# Altium PCB Main.PcbDoc
Units mil, origin at the board's own origin, x right, y up, seen from the top; angles counter-clockwise.
Board outline 2559.06 x 2204.72 mil, 4 copper layers (GND1, Pwr/Sig 2, Pwr/Sig 3, GND4), stack 62.449 mil thick; 21 components, 51 nets, 139 pads, 0 vias.
Unrouted connection lines stored in the file: 52.
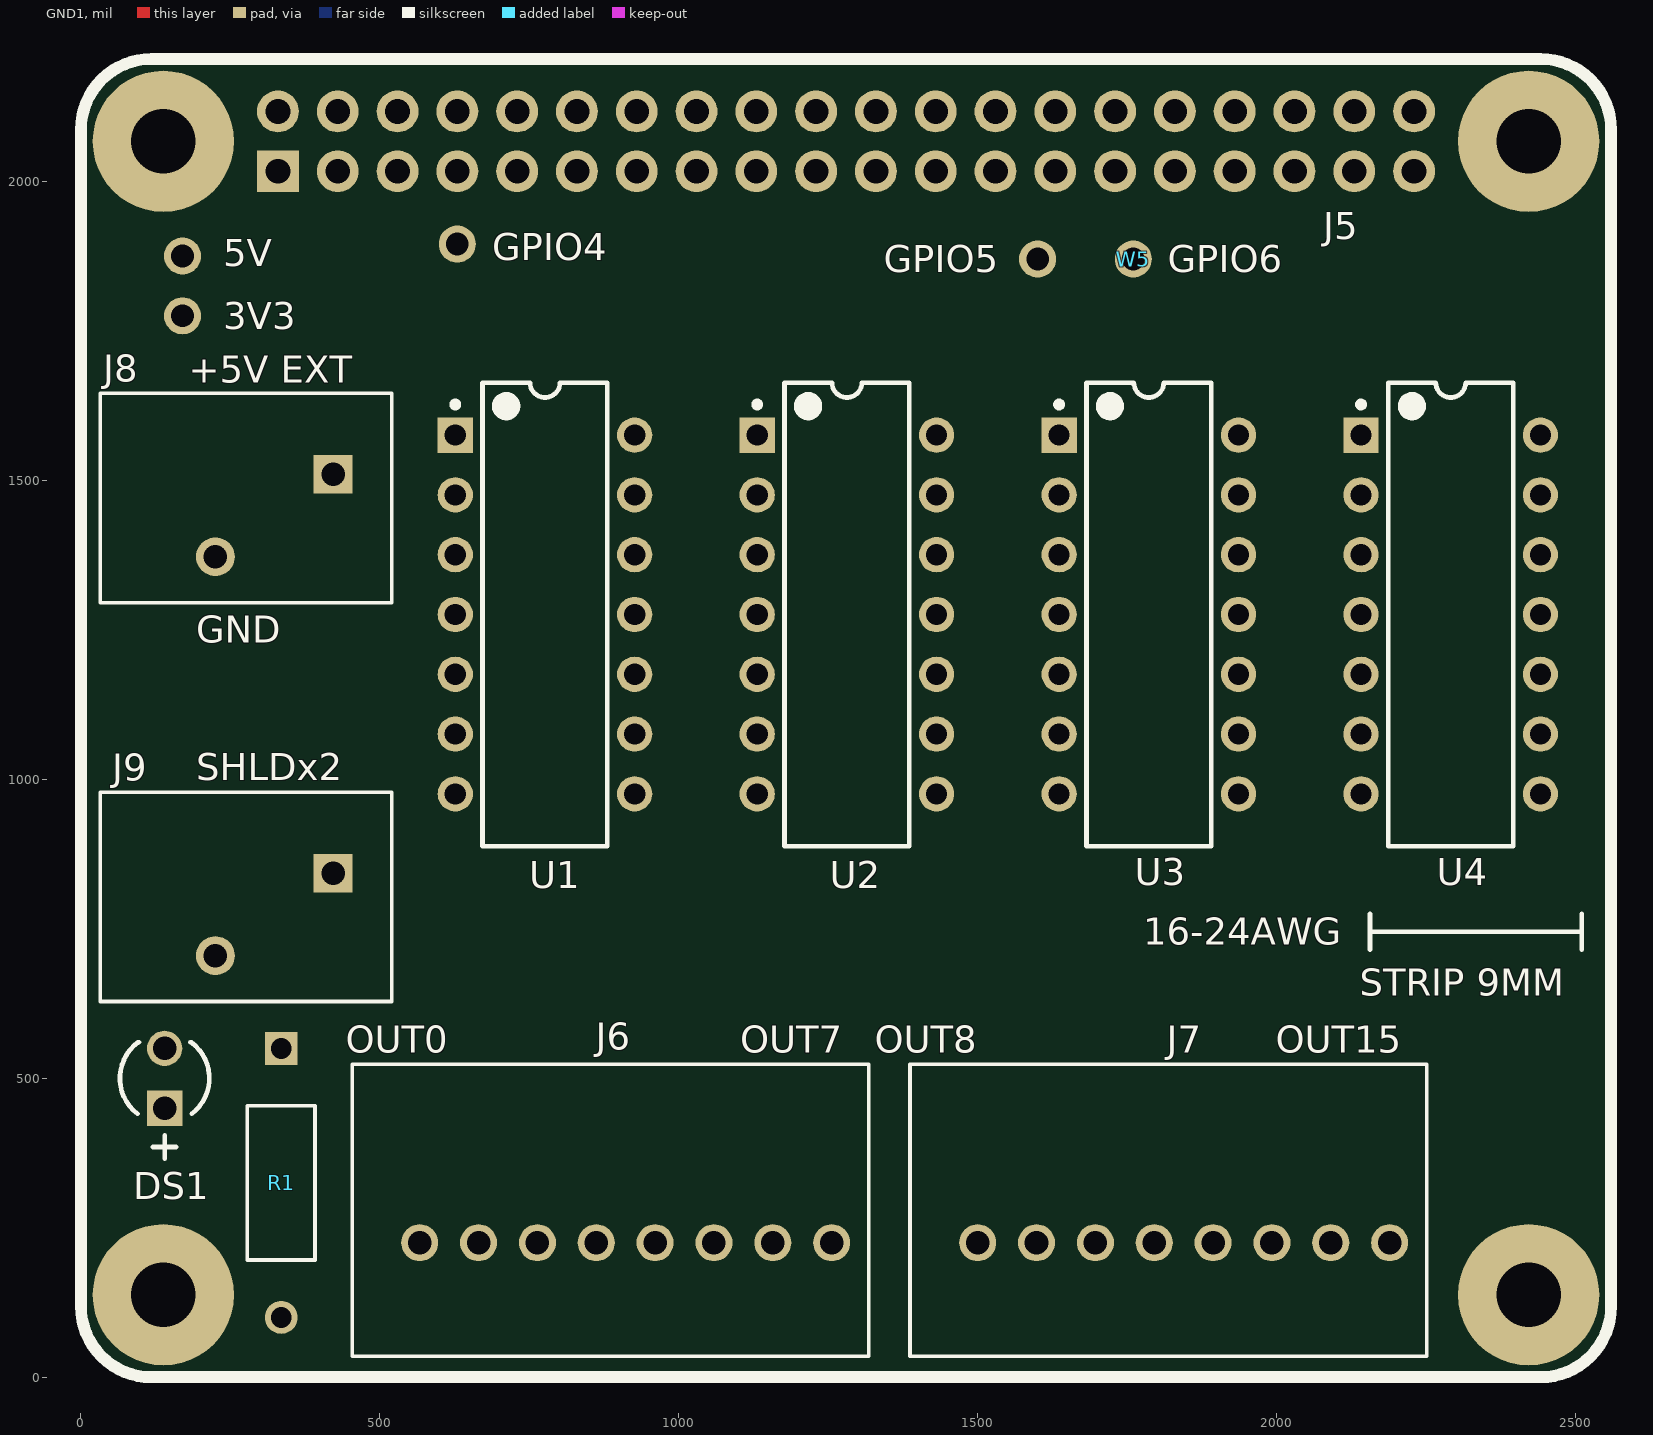
[diagram p0: GND1 view]
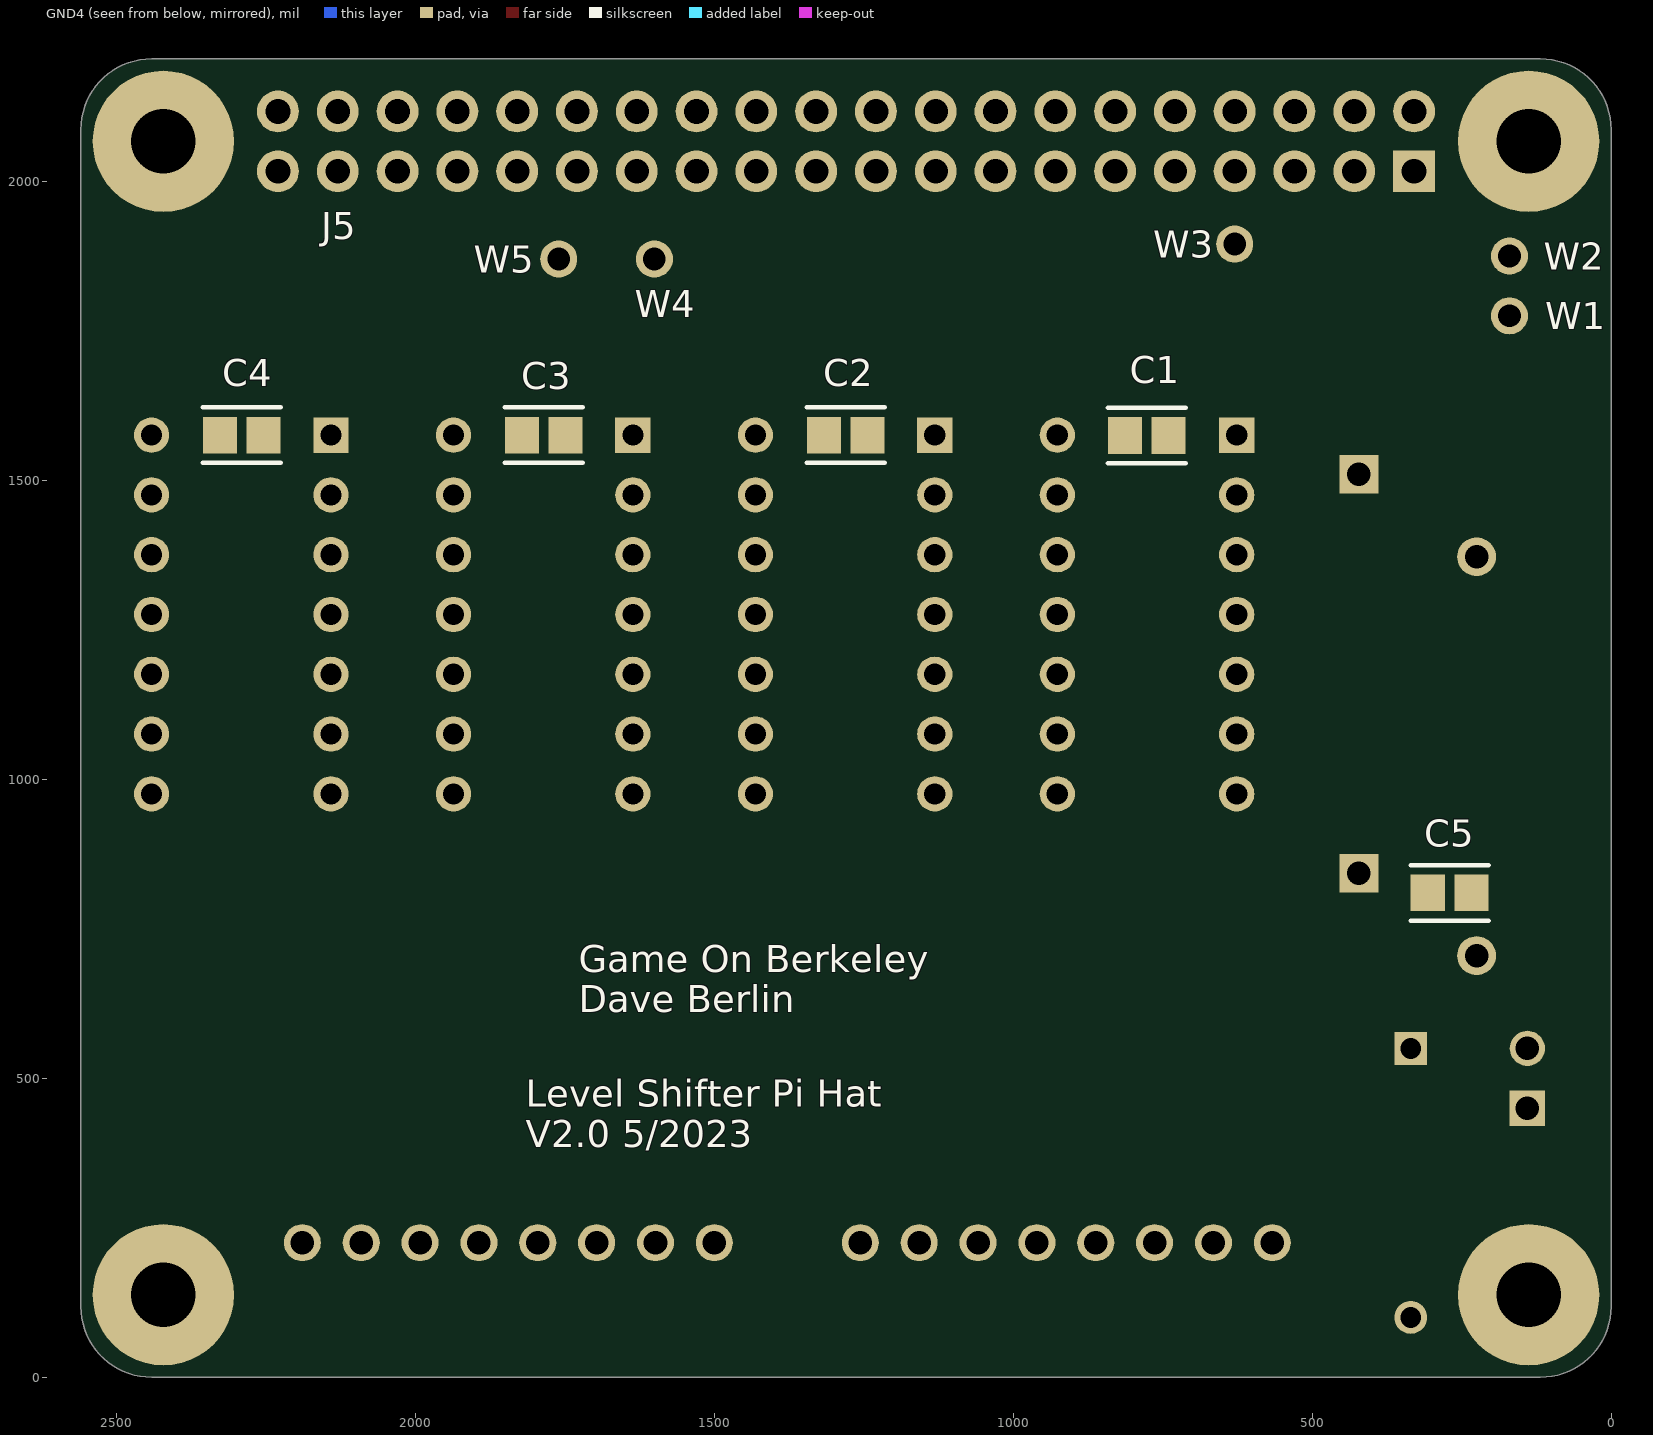
[diagram p1: GND4 view, seen from below]
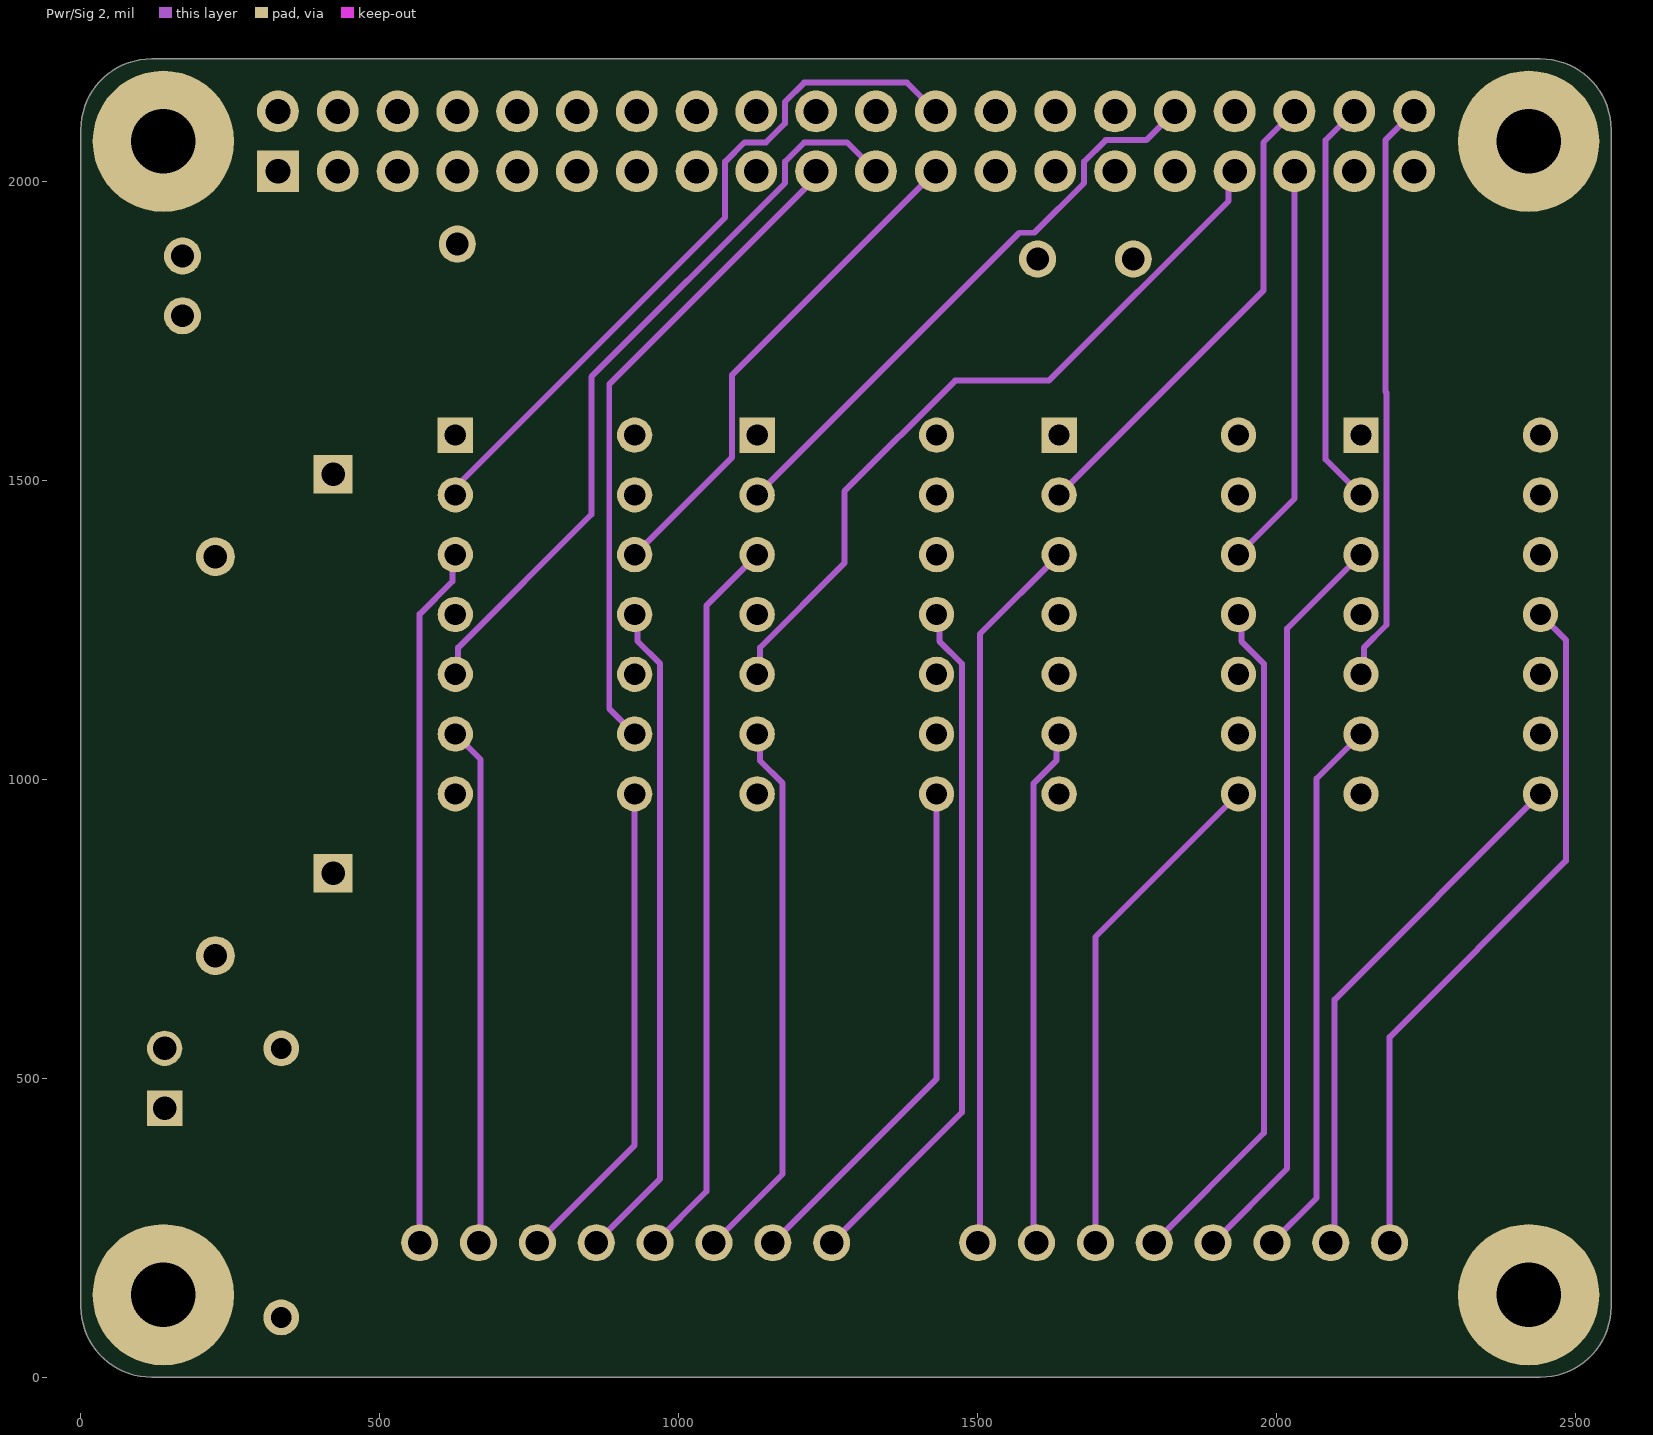
[diagram p2: Pwr/Sig 2]
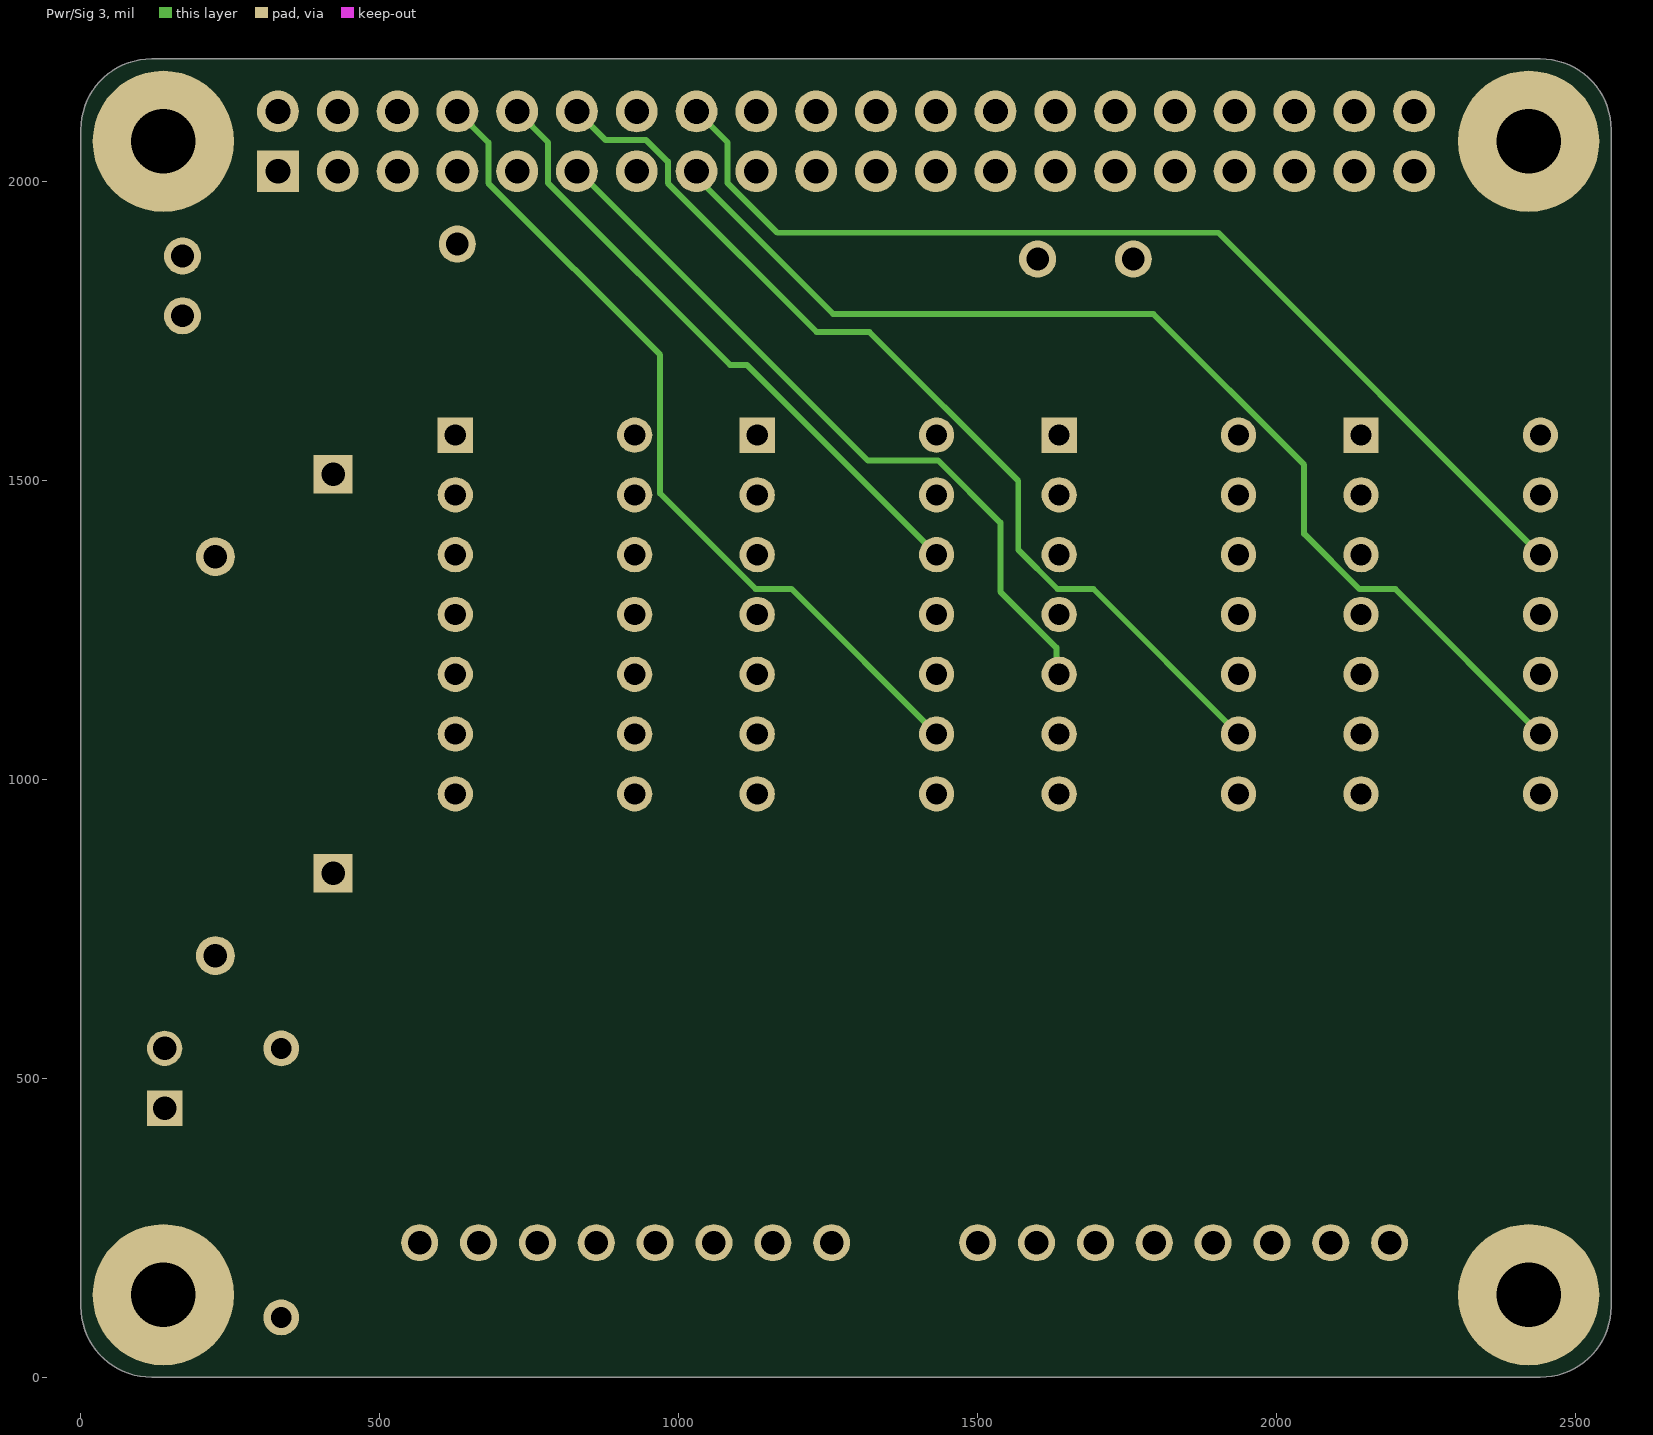
[diagram p3: Pwr/Sig 3]
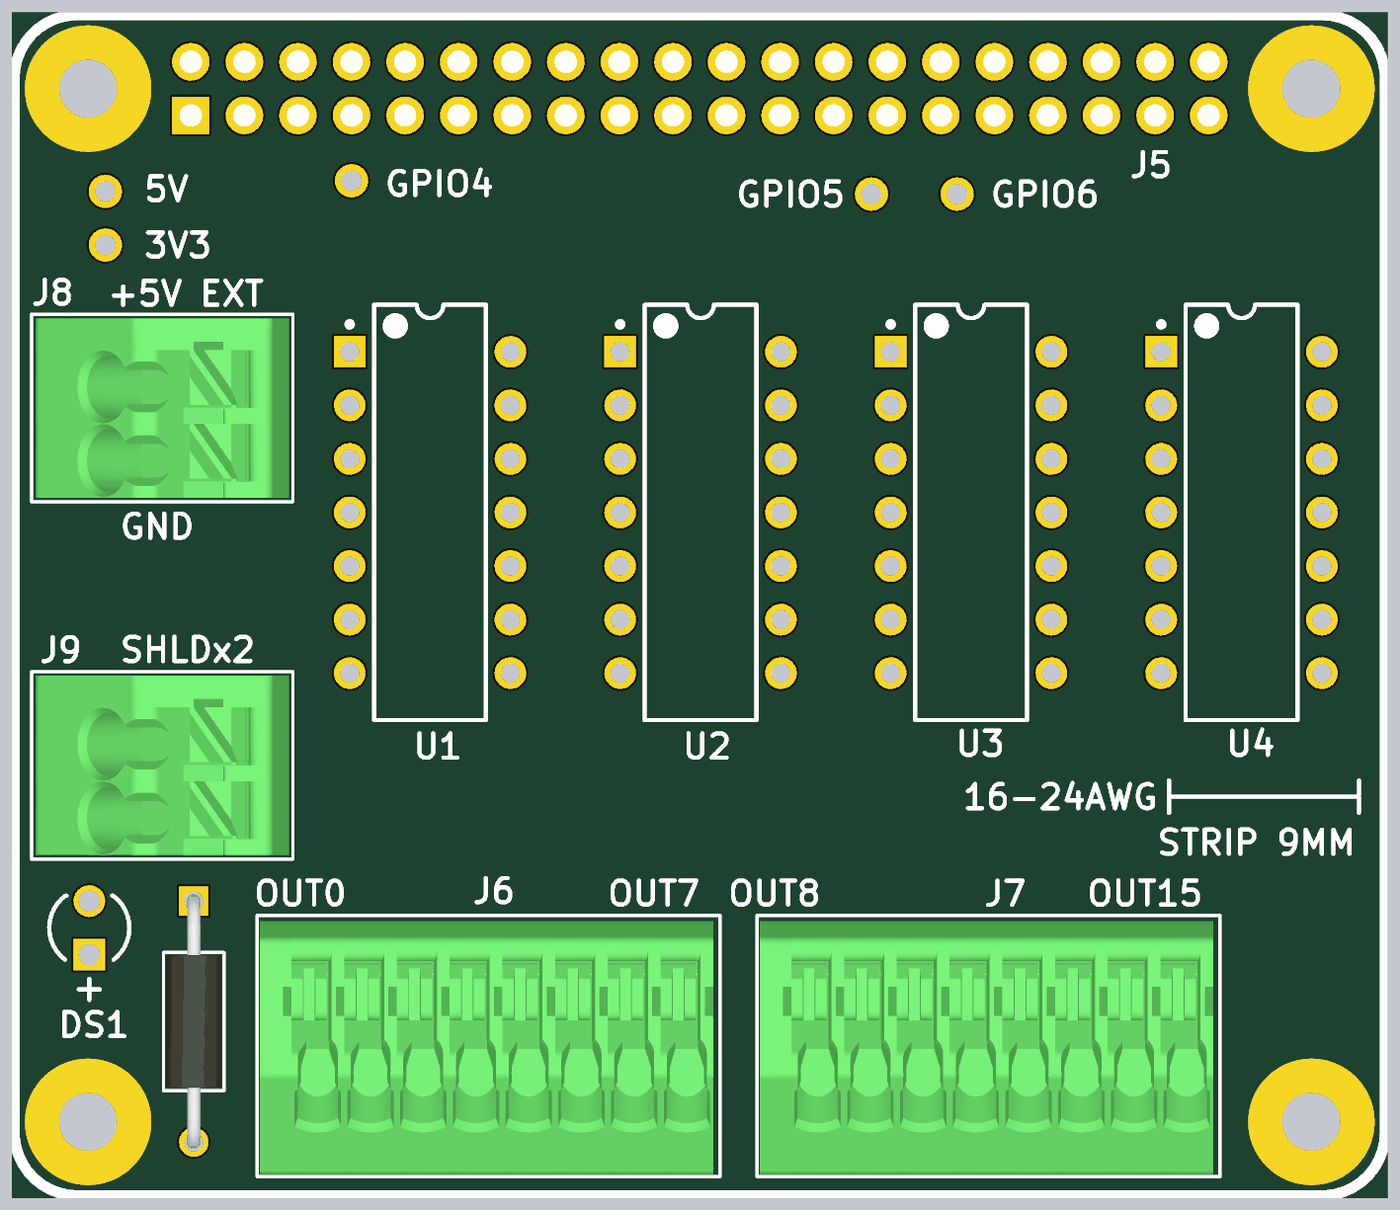
[diagram p4: 3D render of the assembled board from above, using the file's embedded part models]
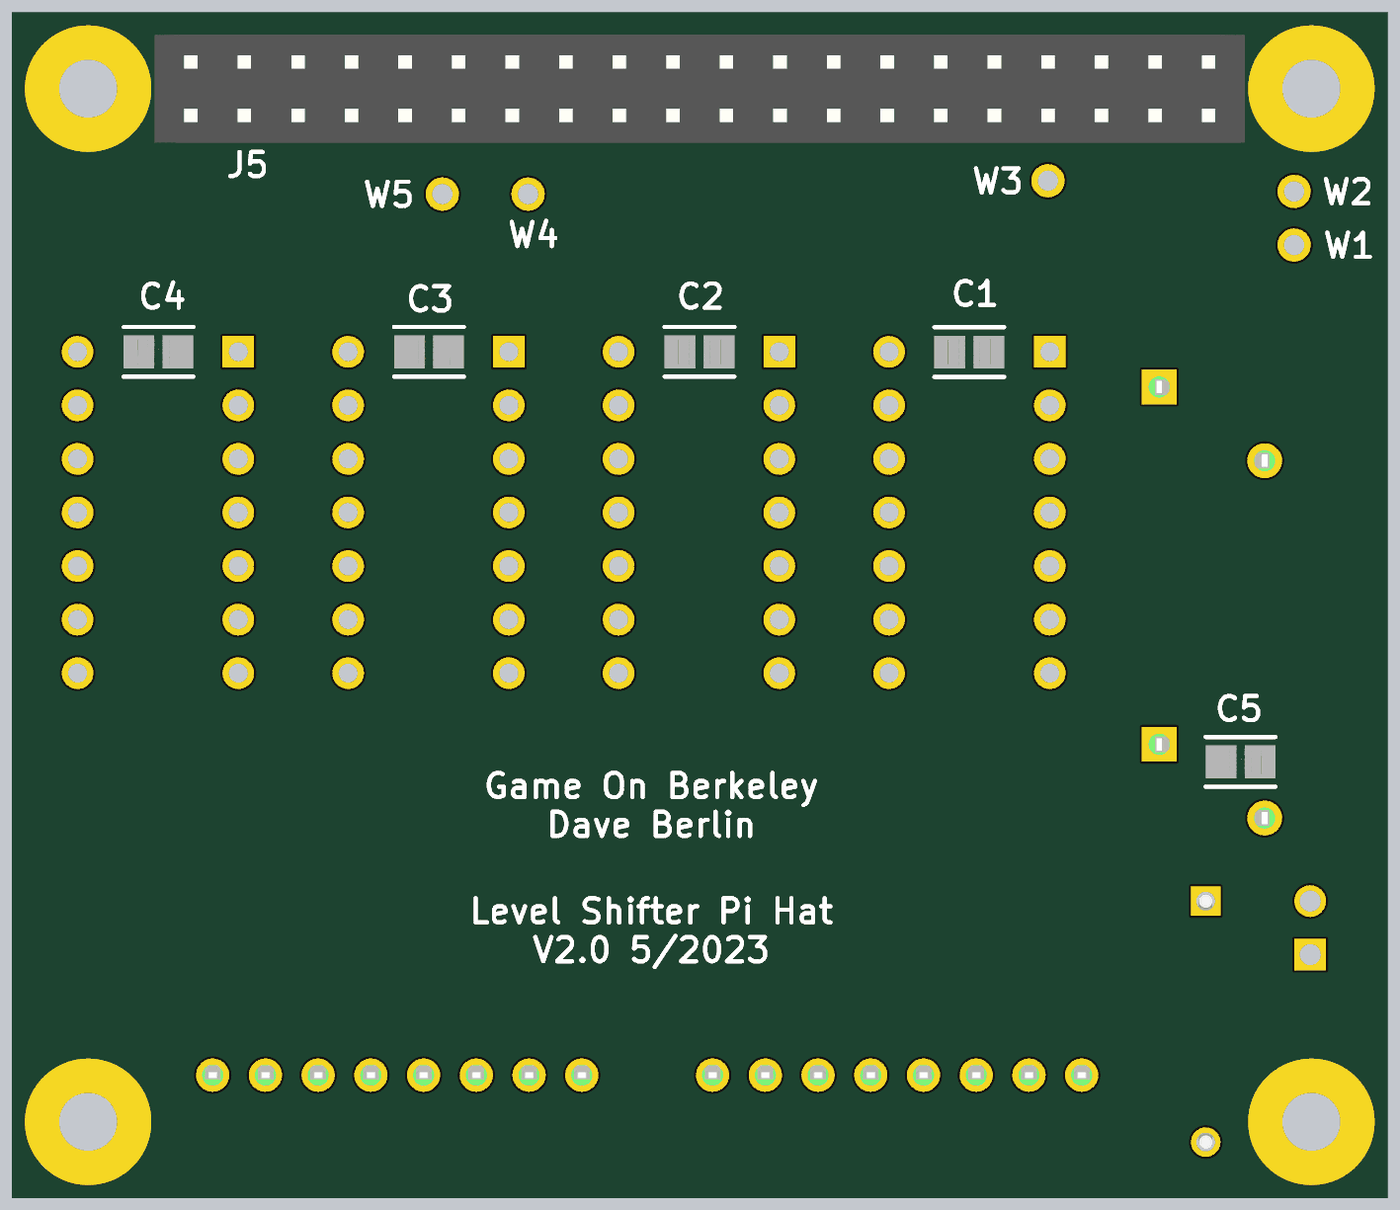
[diagram p5: 3D render of the assembled board from below, using the file's embedded part models]

## Layer stack, top to bottom
Top Solder: solder mask 0.8, Solder Resist, Dk 3.8
GND1: signal copper 1.378
Dielectric 2: prepreg 8.284, PP-022, Dk 4.6
Pwr/Sig 2: signal copper 0.5984
Dielectric 1: dielectric 41.929, FR-4, Dk 4.6
Pwr/Sig 3: signal copper 0.5984
Dielectric 3: prepreg 8.2835, PP-022, Dk 4.6
GND4: signal copper 1.378
Bottom Solder: solder mask 0.8, Solder Resist, Dk 3.8

## Board outline
0,118.11 0,2086.61 cw(c118.11,2086.61) 118.11,2204.72 2440.94,2204.72 cw(c2440.94,2086.61) 2559.06,2086.61 2559.06,118.11 cw(c2440.94,118.11) 2440.94,0 118.11,0 cw(c118.11,118.11)

## Design rules (kind name [scope] priority, off if disabled: settings)
BoardOutlineClearance BoardOutlineClearance_Silk [OnLayer('Top Overlay')] p1: gap=0 ignorepadtopadclearanceinfootprint=FALSE
BoardOutlineClearance [All] p2: gap=7.87 ignorepadtopadclearanceinfootprint=FALSE
Clearance Clearance_HighSpeed1 [InNetClass('HighSpeed')] p1: gap=8 ignorepadtopadclearanceinfootprint=TRUE except(10: Arc-Via Track-Via; 12.99: Arc-Hole Track-Hole; 19.68: THPad-THPad; 20: Arc-Arc Arc-Track Track-Track)
Clearance [All] p2: gap=10 ignorepadtopadclearanceinfootprint=FALSE except(12.99: Arc-Hole Track-Hole; 19.68: THPad-THPad)
Clearance Clearance_Same_Net [All] p3: gap=0 ignorepadtopadclearanceinfootprint=FALSE except(10: Via-Via)
HoleSize HoleSize_Fiducial [HasFootprint('FID1X2R')] p1: absolutevalues=TRUE maxlimit=393.7 minlimit=0 maxpercent=80.000 minpercent=20.000
HoleSize HoleSize_Via [IsVia] p2: absolutevalues=TRUE maxlimit=248.03 minlimit=11.81 maxpercent=80.000 minpercent=20.000
HoleSize [All] p3: absolutevalues=TRUE maxlimit=248.03 minlimit=9.84 maxpercent=80.000 minpercent=20.000
HoleToHoleClearance [All] p1: gap=19.68 allowstackedmicrovias=TRUE
MinimumAnnularRing MinimumAnnularRing_Via [IsVia] p1: minimumring=7.87
MinimumAnnularRing [All] p2: minimumring=9.84
PolygonConnect ViaConnect [All vs IsVia] p1: connectstyle=Direct reliefconductorwidth=10 reliefentries=4 polygonreliefangle="90 Angle" airgapwidth=10
PolygonConnect DFLYConnect [HasFootprint('CR_SK56AFL_MCE')] p2: connectstyle=Relief reliefconductorwidth=20 reliefentries=4 polygonreliefangle="90 Angle" airgapwidth=10
PolygonConnect COUTConnect [HasFootprint('CAP_YX_16X20_RUB')] p3: connectstyle=Relief reliefconductorwidth=20 reliefentries=4 polygonreliefangle="90 Angle" airgapwidth=15
PolygonConnect TransformerConnect [HasFootprint('EE20%2F9%2F11_THT_H_14PIN_EXT_(5443)')] p4: connectstyle=Relief reliefconductorwidth=15 reliefentries=4 polygonreliefangle="90 Angle" airgapwidth=10 // 5 spokes connect per net
PolygonConnect [All] p5: connectstyle=Relief reliefconductorwidth=10 reliefentries=4 polygonreliefangle="90 Angle" airgapwidth=10
ReturnPath [InNetClass('HighSpeed')] p1: _gaplimit=0
RoutingVias [All] p1: holewidth=14.96 width=25 viastyle="Through Hole" minholewidth=11.81 minwidth=19.68 maxholewidth=100 maxwidth=200
SilkToSolderMaskClearance [IsPad] p1: minsilkscreentomaskgap=9 clearancetoexposedcopper=TRUE
SolderMaskExpansion [All] p1: expansion=4 istentingtop=FALSE
UnRoutedNet [All] p1: checkbadconnections=TRUE
Width Width_5V [InNet('5V_EXT')] p1: maxlimit=40 minlimit=40 preferedwidth=40
Width Width_HighSpeed [InNetClass('HighSpeed')] p2: maxlimit=10 minlimit=10 preferedwidth=10
Width [All] p3: maxlimit=100 minlimit=12 preferedwidth=12
26 further rules are at their usual default settings.

## Classes and differential pairs
net class HighSpeed: OUT0 OUT1 OUT2 OUT3 OUT4 OUT5 OUT6 OUT7 OUT8 OUT9 OUT10 OUT11 OUT12 OUT13 OUT14 OUT15 SD0 SD1 SD2 SD3 SD4 SD5 SD6 SD7 SD8 SD9 SD10 SD11 SD12 SD13 SD14 SD15

## Components (designator, comment, footprint, x,y, rotation, side; value= is the part's Value field where it differs from the comment)
C1 "CL21B104KBCNNNC" FP-CL21-IPC_A 776.45,1575 r180 bottom value=100nF
C2 "CL21B104KBCNNNC" FP-CL21-IPC_A 1280,1575.58 r180 bottom value=100nF
C3 "CL21B104KBCNNNC" FP-CL21-IPC_A 1785,1575.58 r180 bottom value=100nF
C4 "CL21B104KBCNNNC" FP-CL21-IPC_A 2290,1575.58 r180 bottom value=100nF
C5 "CL21A475KAQNNNE" FP-CL21-IPC_A 270,810 r180 bottom value=4.7uF
DS1 "BL-BGE1V5D-AT" LED-2P-2.54-3MM 140,500 r90 top
J5 "PRT-16763" PRT-16763-Footprint-1 329.53,2116.93 r0 bottom locked
J6 "1989803" CONN_1989803_PXC 566.57,225 r0 top
J7 "1989803" CONN_1989803_PXC 1499.73,225 r0 top
J8 "1985195" CONN_1985195_PXC 225,1372.2 r270 top
J9 "1985195" CONN_1985195_PXC 225,705 r270 top
R1 "CF14JT150R" STA_CF14_STP 335,550 r270 top value=150R
U1 "SN74AHCT125N" N0014A 776.1,1275.58 r0 top
U2 "SN74AHCT125N" N0014A 1281.02,1275.58 r0 top
U3 "SN74AHCT125N" N0014A 1785.94,1275.58 r0 top
U4 "SN74AHCT125N" N0014A 2290.87,1275.58 r0 top
W1 "WIRE-PAD-20AWG" WIRE-PAD-20AWG 170,1775 r180 bottom
W2 "WIRE-PAD-20AWG" WIRE-PAD-20AWG 170,1875 r180 bottom
W3 "WIRE-PAD-20AWG" WIRE-PAD-20AWG 629.53,1895 r180 bottom
W4 "WIRE-PAD-20AWG" WIRE-PAD-20AWG 1600,1870 r180 bottom
W5 "WIRE-PAD-20AWG" WIRE-PAD-20AWG 1760,1870 r0 top

## Footprints (in the part's own frame and the unit in brackets; to place one, negate y for a bottom-side part, rotate by r counter-clockwise, add the part's x,y. Pads: shape width x height; smd on the part's side, far side on the other; paste and mask are expansions set on the pad)
CONN_1985195_PXC [mm]
  rect 1.65x1.65 hole 1: 1(-3.5,5)
  round 1.65 hole 1: 2(0,0)
  silkscreen extent -6.95,-4.9 1.95,7.5, body extent -6.75,-4.7 1.75,7.3, height 13.1
CONN_1989803_PXC [mil]
  round 62 hole 39.37: 1(0,0) 2(98.43,0) 3(196.85,0) 4(295.28,0) 5(393.7,0) 6(492.13,0) 7(590.55,0) 8(688.98,0)
  silkscreen extent -113,-190 751,298, body extent -108,-185 738,287, height 516
FP-CL21-IPC_A [mil]
  rect 57.27x61.27 smd paste+0 mask+0: 1(-36.45,0) 2(36.45,0)
  silkscreen extent -65,-46 65,46, body extent -39,-25 39,25, height 57
LED-2P-2.54-3MM [mm] "LED, 2-Leads, Dia 3mm, Pitch 2.54mm"
  rect 1.5x1.5 hole 1: 1(-1.27,0)
  round 1.5 hole 1: 2(1.27,0)
  silkscreen extent -3.42,-1.9 1.52,1.9, body extent -1.9,-1.91 1.52,1.91, height 5.3
N0014A [mm] "DIP, 14-Leads, Body 19.7x6.6mm, Pitch 2.54mm"
  rect 1.5x1.5 hole 0.9: 1(-3.81,7.62)
  round 1.5 hole 0.9: 2(-3.81,5.08) 3(-3.81,2.54) 4(-3.81,0) 5(-3.81,-2.54) 6(-3.81,-5.08) 7(-3.81,-7.62) 8(3.81,-7.62) 9(3.81,-5.08) 10(3.81,-2.54) 11(3.81,0) 12(3.81,2.54) 13(3.81,5.08) 14(3.81,7.62)
  silkscreen extent -3.93,-9.85 2.65,9.85, body extent -3.95,-9.85 3.95,9.85, height 5.08
PRT-16763-Footprint-1 [mil]
  rect 70x70 hole 41.34: 1(0,100)
  round 70 hole 41.34: 2(0,0) 3(100,100) 4(100,0) 5(200,100) 6(200,0) 7(300,100) 8(300,0) 9(400,100) 10(400,0) 11(500,100) 12(500,0) 13(600,100) 14(600,0) 15(700,100) 16(700,0) 17(800,100) 18(800,0) 19(900,100) 20(900,0) 21(1000,100) 22(1000,0) 23(1100,100) 24(1100,0) 25(1200,100) 26(1200,0) 27(1300,100) 28(1300,0) 29(1400,100) 30(1400,0) 31(1500,100) 32(1500,0) 33(1600,100) 34(1600,0) 35(1700,100) 36(1700,0) 37(1800,100) 38(1800,0) 39(1900,100) 40(1900,0)
  body extent -68,-51 1968,151, height 630
STA_CF14_STP [mil]
  rect 55x55 / inner round 60 / far side rect 55x55 hole 35: 1(0,0)
  round 55 / inner round 60 / far side round 55 hole 35: 2(450,0)
  silkscreen extent 96,-56 354,57, body extent -12,-51 462,51, height 103
WIRE-PAD-20AWG [mil] "38mil / 1.2mm Hole"
  round 62 hole 38: 1(0,0)

## Part data
C1 C2 C3 C4: library part CMP-001-00097-1, "CAP CER 0.1UF 50V X7R 0805", Case Code (Imperial)=0805, Case Code (Metric)=2012, Dielectric=X7R, Max Operating Temperature=125°C, Min Operating Temperature=-55°C, Tolerance=10%, Voltage=50V, Case/Package=0805, Construction=Flat, Depth=1.25mm, Height=0.85mm, Lead Free="Lead Free", Length=2mm, Material=Ceramic, Mounting Technology="Surface Mount", Packaging="Tape and Reel", Radiation Hardening=No, RoHS Compliant=Yes, Series=CL, Thickness=0.037inch, Voltage Rating=50V, Voltage Rating (DC)=50V, Width=0.049inch
C5: library part CMP-001-00095-2, "CAP CER 4.7UF 25V X5R 0805", Case Code (Imperial)=0805, Case Code (Metric)=2012, Dielectric=X5R, Max Operating Temperature=85°C, Min Operating Temperature=-55°C, Tolerance=10%, Voltage Rating=25V, Case/Package=0805, Construction=Flat, Depth=1.25mm, Height=1.25mm, Lead Free="Lead Free", Length=2mm, Mounting Technology="Surface Mount", Packaging="Tape and Reel", Radiation Hardening=No, RoHS Compliant=Yes, Series=CL, Voltage Rating (DC)=25V
DS1: library part CMP-007-00038-1, "LED Green, 80 mW, 30 mA Max, 200 mcd at 20 mA-40 to 85 degC, 2-Pin THD, RoHS, Bulk", Case/Package=Radial, Colour=Green, Forward Current=30mA, Forward Voltage=2V, Power=80mW, Illumination Colour=Green, Lens Style=Dome, Mounting Technology=TH, Viewing Angle=35degrees
J5: library part CMP-002-00082-1, "Extended GPIO Female Header - 2x20 Pin (16mm/7.30mm)", Flammability Rating="UL94 V-0", Insulation Color=Black, Max Operating Temperature=105°C, Min Operating Temperature=-40°C, Contact Finish - Mating=GOLD, Contact Material=Brass, Contact Shape=Square, Contact Type=Forked, Fastening Type=Pull, Insulation Material=Nylon, Mounting Technology="Through Hole", Number of Positions=40, Number of Rows=2, Series=-, Termination=Solder
J6 J7: library part CMP-002-00083-1, "Conn PC Terminal Block 8 POS 2.5mm Solder Thru-Hole 2A", Color=Green, Current=2A, Max Operating Temperature=85°C, Min Operating Temperature=-40°C, Package Quantity=100, Voltage=300V, Voltage Rating=250V, Approvals=UL,VDE,EAC, Contact Material="Copper Alloy", Current Rating=2A, Height=13.1mm, Housing Color=Green, Housing Material=Nylon, Lead Free="Lead Free", Length=12mm, Material=Nylon, Mounting Technology="Through Hole", Number of Levels=1, Number of Poles=8, Number of Positions=8, Number of Positions Per Level=8, Number of Rows=1, Number of Ways=8, Packaging=Bulk, Pins=8, Pitch=2.5mm, RoHS Compliant=Yes, Series=PTSA, Termination=Screwless, Weight=0.109702oz, Width=21.5mm, Wire Gauge (Max)=26AWG, Wire Gauge (Min)=20AWG, Wire/Cable Gauge=20AWG
J8 J9: library part CMP-002-00079-2, "Conn PC Terminal Block 2 POS 3.5mm Solder Thru-Hole 8A Cardboard", Color=Green, Current=2A, Flammability Rating="UL94 V-2", Max Supply Voltage=250V, Package Quantity=250, Voltage=300V, Approvals=UL,VDE,EAC, Contact Material=Tin, Current Rating=2A, Depth=12mm, Height=13.1mm, Housing Color=Green, Housing Material=Polyamide, Lead Free="Lead Free", Length=8.5mm, Material=Nylon, Max Current Rating=2A, Mounting Technology="Through Hole", Number of Circuits=2, Number of Contacts=2, Number of Levels=1, Number of Poles=2, Number of Positions=2, Number of Positions Per Level=2, Number of Rows=1, Number of Ways=2, Packaging=Bulk, Pins=2, Pitch=3.5mm, Reach SVHC Compliant=Unknown, RoHS Compliant=Yes, Series="COMBICON PTSA", Termination=Solder, Voltage Rating=250V, Weight=0.043387oz, Width=16.7mm, Wire Gauge (Max)=24AWG, Wire Gauge (Min)=16AWG, Wire/Cable Gauge=16AWG
R1: library part CMP-009-00191-1, "CF Series 0.25 W 150 Ohm ±5 % 0 to -400 ppm/°C Through Hole Carbon Film Resistor", Case/Package=Conformal, Max Operating Temperature=155°C, Max Power Dissipation=250mW, Min Operating Temperature=-55°C, Temperature Coefficient=-400ppm/°C, Tolerance=5%, Construction=Cylindrical, Contact Plating=Tin,Matte, Diameter=2.3mm, Features="Flame Retardant Coating", Lead Free="Lead Free", Length=6.5mm, Military Standard=Not, Mounting Technology="Through Hole,Axial", Number of Terminations=2, Packaging="Tape and Reel", Power Rating=250mW, Radiation Hardening=No, RoHS Compliant=Yes, Series=CF, Termination=Axial
U1 U2 U3 U4: library part CMP-024-00000-1, "Buffer/Line Driver 4-CH Non-Inverting 3-ST CMOS 14-Pin PDIP Tube", Case/Package=PDIP, High Level Output Current=-8mA, Low Level Output Current=8mA, Max Operating Temperature=125°C, Max Supply Voltage=5.5V, Min Operating Temperature=-40°C, Min Supply Voltage=4.5V, Operating Supply Voltage=5V, Package Quantity=25, Quiescent Current=2uA, Lead Free="Lead Free", Logic Function=Buffer,Inverting, Mounting Technology="Through Hole", Number of Bits=4, Number of Bits per Element=1, Number of Channels=4, Number of Circuits=4, Number of Elements=4, Number of Input Lines=4, Number of Inputs=4, Number of Output Lines=4, Number of Outputs=4, Output Type=3-STATE, Packaging=Rail/Tube, Pins=14, Polarity=Non-Inverting, Propagation Delay=7.5ns, Reach SVHC Compliant=No, RoHS Compliant=Yes, Series=74AHCT, Technology=CMOS, Termination="Through Hole", Turn-On Delay Time=10ns
W1 W2 W3 W4 W5: library part CMP-00028-00008-2, "38mil / 1.2mm Hole", Pins=1

## Free pads (board coordinates)
  round 236.22 hole 108.27 mask+0: ""(137.8,137.8) ""(137.8,2066.93) ""(2421.26,137.8) ""(2421.26,2066.93)

## Nets (pads, with @x,y where several pads share a name; then routed paths per layer and width w, separated by ;. In a path a pad name is that pad's centre, name@x,y a point inside that pad or via, vN(x,y) a via of type N, cw(c..) or ccw(c..) an arc to the next point about the centre after c; other vN are vias at no path point)
3V3_1: J5.1 W1.1
3V3_2: J5.17
5V_1: J5.2 W2.1
5V_2: J5.4
5V_EXT: C1.1 C2.1 C3.1 C4.1 C5.2 J8.1 R1.1 U1.14 U2.14 U3.14 U4.14
EN0: C1.2 C2.2 C3.2 C4.2 C5.1 DS1.2 J5.6 J5.9 J5.14 J5.20 J5.25 J5.30 J5.34 J5.39 J8.2 J9.1 J9.2 U1.1 U1.4 U1.7 U1.10 U1.13 U2.1 U2.4 U2.7 U2.10 U2.13 U3.1 U3.4 U3.7 U3.10 U3.13 U4.1 U4.4 U4.7 U4.10 U4.13
GPIO2: J5.3
GPIO3: J5.5
GPIO4: J5.7 W3.1
GPIO5: J5.29 W4.1
GPIO6: J5.31 W5.1
GPIO7: J5.26
GPIO24: J5.18
GPIO25: J5.22
GPIO26: J5.37
GPIO27: J5.13
ID_SC: J5.28
ID_SD: J5.27
NetDS1_1: DS1.1 R1.2
OUT0: J6.1 U1.3 | length 1175.2
  Pwr/Sig 2 w10: J6.1 566.57,1276.19 621.43,1331.05 621.43,1370.91 U1.3
OUT1: J6.2 U1.6 | length 869.7
  Pwr/Sig 2 w10: U1.6 668.63,1033.05 668.63,228.63 J6.2
OUT2: J6.3 U1.8 | length 818
  Pwr/Sig 2 w10: J6.3 926.1,387.68 U1.8
OUT3: J6.4 U1.11 | length 1112.4
  Pwr/Sig 2 w10: J6.4 968.63,331.78 968.63,1193.19 930.77,1231.05 930.77,1270.91 U1.11
OUT4: J6.5 U2.3 | length 1221.3
  Pwr/Sig 2 w10: J6.5 1045.93,310.65 1045.93,1290.49 U2.3
OUT5: J6.6 U2.6 | length 915.8
  Pwr/Sig 2 w10: J6.6 1173.55,339.85 1173.55,993.19 1135.69,1031.05 1135.69,1070.91 U2.6
OUT6: J6.7 U2.8 | length 864
  Pwr/Sig 2 w10: J6.7 1431.02,498.9 U2.8
OUT7: J6.8 U2.11 | length 1158.5
  Pwr/Sig 2 w10: J6.8 1473.55,443 1473.55,1193.19 1435.69,1231.05 1435.69,1270.91 U2.11
OUT8: J7.1 U3.3 | length 1207
  Pwr/Sig 2 w10: J7.1 1503.55,228.82 1503.55,1243.18 U3.3
OUT9: J7.2 U3.6 | length 870.2
  Pwr/Sig 2 w10: J7.2 1593.42,229.73 1593.42,993.19 1631.27,1031.05 1631.27,1070.91 U3.6
OUT10: J7.3 U3.8 | length 849.7
  Pwr/Sig 2 w10: J7.3 1696.58,736.21 U3.8
OUT11: J7.4 U3.11 | length 1144.2
  Pwr/Sig 2 w10: J7.4 1978.47,408.47 1978.47,1193.19 1940.62,1231.05 1940.62,1270.91 U3.11
OUT12: J7.5 U4.3 | length 1253.1
  Pwr/Sig 2 w10: J7.5 2017.43,349 2017.43,1252.14 U4.3
OUT13: J7.6 U4.6 | length 912.3
  Pwr/Sig 2 w10: J7.6 2066.64,299.79 2066.64,1001.35 U4.6
OUT14: J7.7 U4.8 | length 895.8
  Pwr/Sig 2 w10: J7.7 2096.64,231.36 2096.64,631.35 U4.8
OUT15: J7.8 U4.11 | length 1190.3
  Pwr/Sig 2 w10: J7.8 2188.7,568.79 2483.39,863.48 2483.39,1233.05 U4.11
SD0: J5.24 U1.2 | length 1191.8
  Pwr/Sig 2 w10: U1.2 626.1,1488.05 1077.53,1939.47 1077.53,2032.81 1109.65,2064.93 1145.41,2064.93 1177.53,2097.05 1177.53,2132.81 1209.65,2164.93 1381.53,2164.93 J5.24
SD1: J5.21 U1.5 | length 1270.8
  Pwr/Sig 2 w10: U1.5 630.77,1180.25 630.77,1220.1 853.57,1442.91 853.57,1673.09 1177.53,1997.05 1177.53,2032.81 1209.65,2064.93 1281.53,2064.93 J5.21
SD2: J5.19 U1.9 | length 1102.3
  Pwr/Sig 2 w10: U1.9 883.57,1118.1 883.57,1660.67 1229.53,2006.62 J5.19
SD3: J5.23 U1.12 | length 849.9
  Pwr/Sig 2 w10: U1.12 1088.5,1537.97 1088.5,1675.9 J5.23
SD4: J5.32 U2.2 | length 985.1
  Pwr/Sig 2 w10: U2.2 1569.45,1914 1594.48,1914 1677.53,1997.05 1677.53,2032.81 1713.65,2068.93 1781.53,2068.93 J5.32
SD5: J5.33 U2.5 | length 1264
  Pwr/Sig 2 w10: U2.5 1135.69,1180.25 1135.69,1220.1 1276.91,1361.32 1276.91,1481.61 1461.99,1666.69 1618.92,1666.69 1919.16,1966.93 1919.16,2006.56 J5.33
SD6: J5.8 U2.9 | length 1408.6
  Pwr/Sig 3 w10: J5.8 681.53,2064.93 681.53,1997.05 968.63,1709.95 968.63,1477.83 1128.35,1318.1 1188.5,1318.1 U2.9
SD7: J5.10 U2.12 | length 1048.3
  Pwr/Sig 3 w10: J5.10 781.53,2064.93 781.53,1997.05 1085.57,1693.01 1113.6,1693.01 U2.12
SD8: J5.36 U3.2 | length 804.4
  Pwr/Sig 2 w10: U3.2 1977.53,1817.16 1977.53,2064.93 J5.36
SD9: J5.11 U3.5 | length 1245.8
  Pwr/Sig 3 w10: J5.11 832.1,2016.93 1315.98,1533.05 1433.69,1533.05 1537.6,1429.14 1537.6,1313.78 1631.27,1220.1 1631.27,1180.25 U3.5
SD10: J5.12 U3.9 | length 1626.3
  Pwr/Sig 3 w10: J5.12 877.53,2068.93 945.41,2068.93 981.53,2032.81 981.53,1997.05 1230.48,1748.1 1318.65,1748.1 1567.6,1499.14 1567.6,1383.78 1633.27,1318.1 1693.42,1318.1 U3.9
SD11: J5.35 U3.12 | length 680.1
  Pwr/Sig 2 w10: U3.12 2029.53,1469.16 J5.35
SD12: J5.38 U4.2 | length 685.8
  Pwr/Sig 2 w10: J5.38 2081.53,2068.93 2081.53,1534.91 U4.2
SD13: J5.40 U4.5 | length 979.6
  Pwr/Sig 2 w10: U4.5 2145.54,1180.25 2145.54,1220.1 2183.39,1257.96 2183.39,1646.45 2181.53,1648.32 2181.53,2068.93 J5.40
SD14: J5.15 U4.9 | length 1874.9
  Pwr/Sig 3 w10: J5.15 1029.53,2006.62 1258.05,1778.1 1793.57,1778.1 2045.88,1525.79 2045.88,1410.42 2138.2,1318.1 2198.34,1318.1 U4.9
SD15: J5.16 U4.12 | length 1758.2
  Pwr/Sig 3 w10: J5.16 1081.53,2064.93 1081.53,1997.05 1164.58,1914 1902.44,1914 U4.12

## Silkscreen, mask and mechanical layers (free items; w line width, h text height)
Top Overlay:
  lines w8: 2155.67,715 2155.67,775 ; 2155.67,745 2510,745 ; 2510,715 2510,775
  lines w20: 0,118.11 ccw(c118.11,118.11) 118.11,0 2440.94,0 ccw(c2440.94,118.11) 2559.06,118.11 2559.06,2086.61 ccw(c2440.94,2086.61) 2440.94,2204.72 118.11,2204.72 ccw(c118.11,2086.61) 0,2086.61 0,118.11
  text "J5" at 2078,1903 h45
  text "GPIO4" at 687.53,1868 h45
  text "5V" at 238,1858 h45
  text "GPIO5" at 1343,1848 h45
  text "GPIO6" at 1818,1848 h45
  text "3V3" at 238,1753 h45
  text "+5V EXT" at 180.05,1663 h45
  text "GND" at 193,1228 h45
  text "SHLDx2" at 193,998 h45
  text "16-24AWG" at 1776.3,723 h45
  text "STRIP 9MM" at 2138.81,638 h45
  text "OUT0" at 443,543 h45
  text "OUT7" at 1103,543 h45
  text "OUT8" at 1328,543 h45
  text "OUT15" at 1998,543 h45
Bottom Overlay:
  text "Game On Berkeley / Dave Berlin" at 1726.64,610 h45
  text "Level Shifter Pi Hat / V2.0 5/2023" at 1815,385 h45
Mechanical 1:
  lines w10: 579.25,881.77 579.25,1669.17 972.95,1669.17 972.95,881.77 579.25,881.77 ; 1084.17,881.77 1084.17,1669.17 1477.87,1669.17 1477.87,881.77 1084.17,881.77 ; 1589.1,881.77 1589.1,1669.17 1982.8,1669.17 1982.8,881.77 1589.1,881.77 ; 2094.02,881.77 2094.02,1669.17 2487.72,1669.17 2487.72,881.77 2094.02,881.77
Board:
  the board outline again, w10